# EAGLE board IR (EAGLE 9.4.2)
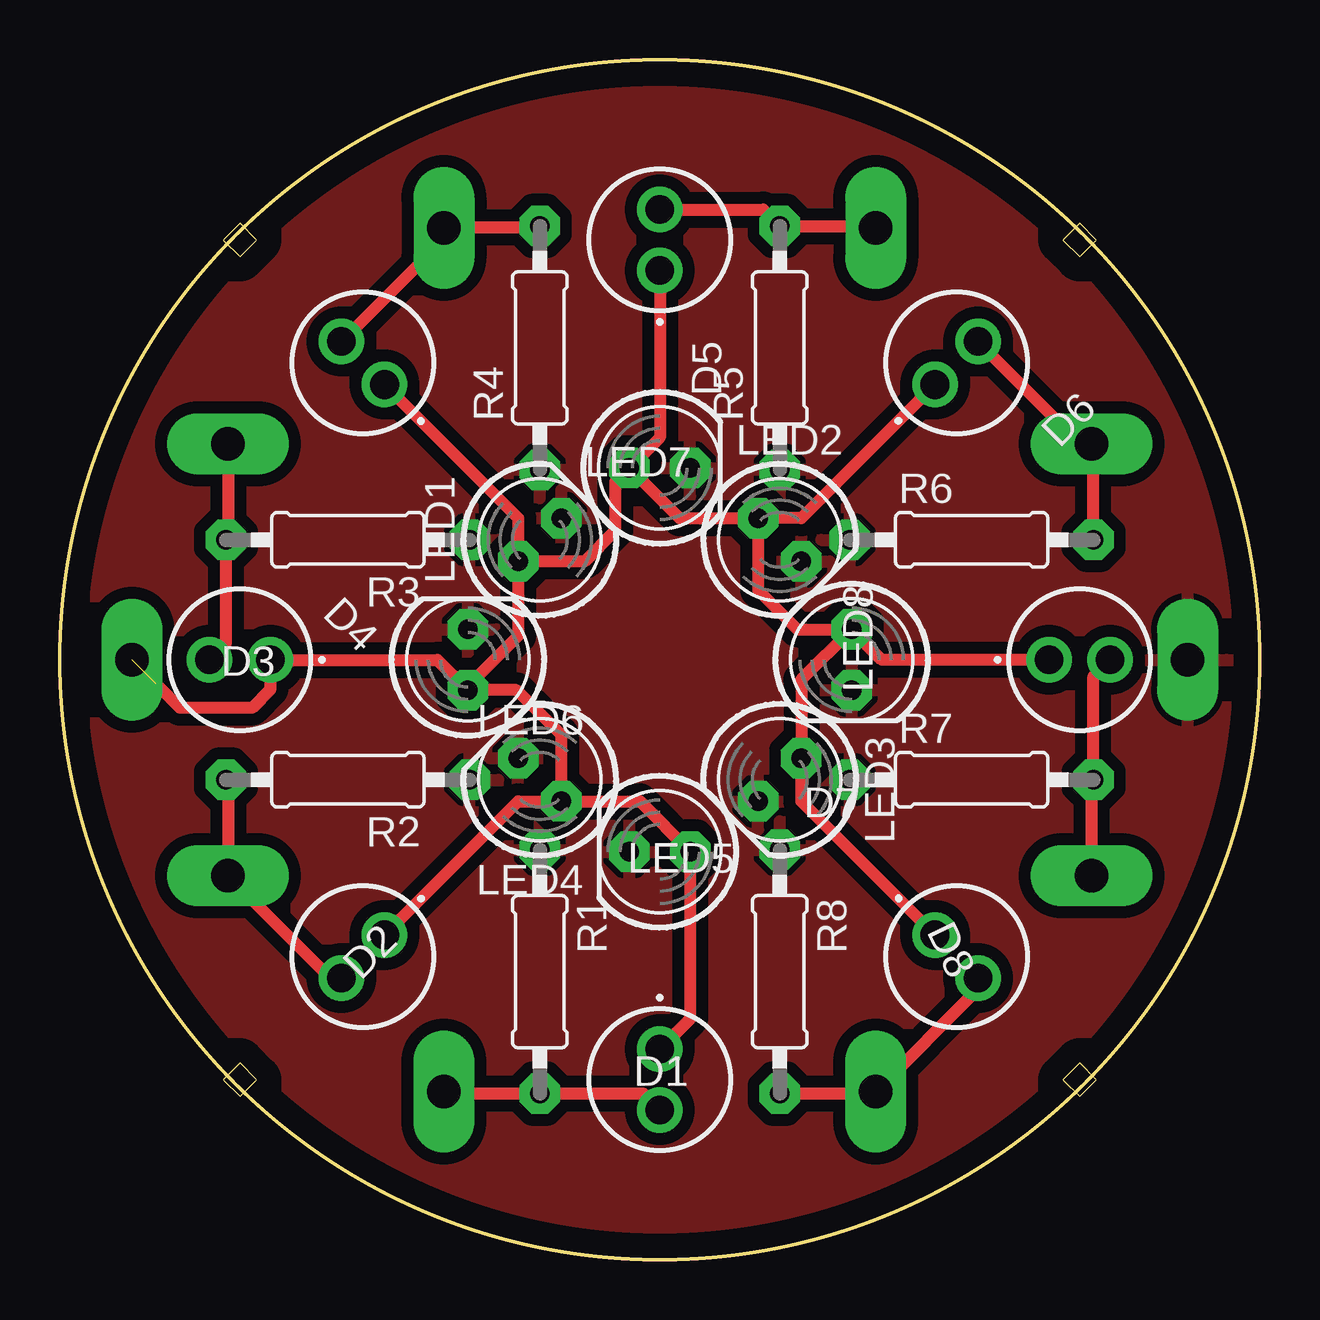
[diagram p0: board, top side]

Size 50 x 50 mm. Coordinates in mm from the lower left corner, seen from the top.
Outline: circle at 25,25 radius 25
Copper layers (1*16): Top 0.035mm / dielectric 1.5mm / Bottom 0.035mm
Design rules "default *": minimum track width 0.5mm, minimum drill 0.35mm, track to track 6mil, track to pad 6mil, pad to pad 6mil, via to via 6mil, smd to smd 6mil, copper to edge 40mil, drill to drill 6mil, minimum pad ring 10mil, minimum via ring 8mil, stop-mask expansion 4mil, vias tented up to drill 0mil, thermal gap 10mil

## Footprints (pad centres in the part's own frame; a part is rotated, then mirrored left to right if it is on the bottom)
SFH213_1 = drill 1.2 pad 1.9: 1 -1.27,0; 2 1.27,0
1X1-BIGPOGO = drill 1.4 pad 2.54 long: P$1 0,0
LED5MM = drill 0.813 pad 1.676 octagon: A -1.27,0; K 1.27,0
0207/10 = drill 0.813 pad 1.676 octagon: 1 -5.08,0; 2 5.08,0

## Placement (x,y rotation side)
D1  SFH_203_PFA  [SFH213_1]  25,7.5 270 top
D2  SFH_203_PFA  [SFH213_1]  12.63,12.63 225 top
D3  SFH_203_PFA  [SFH213_1]  7.5,25 180 top
D4  SFH_203_PFA  [SFH213_1]  12.63,37.37 135 top
D5  SFH_203_PFA  [SFH213_1]  25,42.5 90 top
D6  SFH_203_PFA  [SFH213_1]  37.37,37.37 45 top
D7  SFH_203_PFA  [SFH213_1]  42.5,25 0 top
D8  SFH_203_PFA  [SFH213_1]  37.37,12.63 315 top
JP1  4  [1X1-BIGPOGO]  16,43 270 top
JP2  5  [1X1-BIGPOGO]  34,43 270 top
JP3  3  [1X1-BIGPOGO]  7,34 180 top
JP4  6  [1X1-BIGPOGO]  43,34 180 top
JP5  8  [1X1-BIGPOGO]  34,7 90 top
JP6  2  [1X1-BIGPOGO]  7,16 180 top
JP7  7  [1X1-BIGPOGO]  43,16 180 top
JP8  1  [1X1-BIGPOGO]  16,7 90 top
JP9  GND  [1X1-BIGPOGO]  47,25 270 top
JP10  3.3  [1X1-BIGPOGO]  3,25 90 top
LED1  [LED5MM]  17,25 90 top
LED2  [LED5MM]  25,33 0 top
LED3  [LED5MM]  33,25 270 top
LED4  [LED5MM]  25,17 180 top
LED5  [LED5MM]  30,20 225 top
LED6  [LED5MM]  20,20 135 top
LED7  [LED5MM]  20,30 45 top
LED8  [LED5MM]  30,30 315 top
R1  [0207/10]  20,12 270 top
R2  [0207/10]  12,20 180 top
R3  [0207/10]  12,30 180 top
R4  [0207/10]  20,38 90 top
R5  [0207/10]  30,38 90 top
R6  [0207/10]  38,30 0 top
R7  [0207/10]  38,20 0 top
R8  [0207/10]  30,12 270 top

## Library data of the parts
D1-D8 = SFH_203_PFA; ALLIED_NUMBER: 70339002; ALLIED_PRICE-STOCK: https://www.alliedelec.com/osram-opto-semiconductors-sfh-203-pfa/70339002/; DESCRIPTION: IR T-1 PIN Photodiode 150,SFH203PFA Osram Opto SFH 203 PFA IR Si Photodiode, 75 , Through Hole 5mm package; HEIGHT: mm; MANUFACTURER_NAME: OSRAM Opto Semiconductors; MANUFACTURER_PART_NUMBER: SFH 203 PFA; MOUSER_PART_NUMBER: 720-SFH203PFA; MOUSER_PRICE-STOCK: https://www.mouser.com/Search/Refine.aspx?Keyword=720-SFH203PFA; RS_PART_NUMBER: 6548665; RS_PRICE-STOCK: https://uk.rs-online.com/web/p/products/6548665
JP1-JP10 LED1-LED8 R1-R8 = adafruit

## Nets
N$1: D1.2 JP8.P$1 R1.2
N$2: D2.2 JP6.P$1 R2.2
N$3: D3.2 JP3.P$1 R3.2
N$4: D4.2 JP1.P$1 R4.2
N$5: D5.2 JP2.P$1 R5.2
N$6: D6.2 JP4.P$1 R6.2
N$7: D7.2 JP7.P$1 R7.2
N$8: D8.2 JP5.P$1 R8.2
N$9: D1.1 D2.1 D3.1 D4.1 D5.1 D6.1 D7.1 D8.1 JP10.P$1 LED1.A LED2.A LED3.A LED4.A LED5.A LED6.A LED7.A LED8.A
N$10: JP9.P$1 LED1.K LED2.K LED3.K LED4.K LED5.K LED6.K LED7.K LED8.K R1.1 R2.1 R3.1 R4.1 R5.1 R6.1 R7.1 R8.1

## Tracks (layer width: path | path; a pad name or v marks a point on that pad's centre or on a via)
N$1
  Top 0.5: D1.2 24.31,6.92 R1.2 17,6.92 JP8.P$1
N$2
  Top 0.5: 6.92,17.08 7,17 | 7,17 JP6.P$1 11.27,11.73 D2.2 | R2.2 7,19.92 7,17
N$3
  Top 0.5: JP3.P$1 7,30.08 R3.2 6.92,25.69 D3.2
N$4
  Top 0.5: R4.2 19.96,43.04 | 19.96,43.04 19.92,43 | D4.2 16,42.54 JP1.P$1 16.04,43.04 19.96,43.04
N$5
  Top 0.5: 30.08,43 R5.2 | R5.2 33.92,43.08 JP2.P$1 | D5.2 29.31,43.77 R5.2
N$6
  Top 0.5: R6.2 43.08,33.92 JP4.P$1 42.54,34 D6.2
N$7
  Top 0.5: 43.08,16.08 JP7.P$1 43,19.92 R7.2 43.08,24.31 D7.2
N$8
  Top 0.5: R8.2 33.92,6.92 JP5.P$1 38.27,11.27 D8.2
N$9  (1 unrouted)
  Top 0.5: 4,24 5,23 8,23 8.77,23.77 D3.1 15.73,25 LED1.A | D5.1 25,34.27 LED2.A | LED2.A 25.83,30.9 LED8.A | LED8.A 29.1,27.9 30.73,26.27 LED3.A | LED3.A 30.9,24.17 LED5.A 30.9,19.1 D8.1 | LED2.A 23.14,32.41 23.14,30.38 21.86,29.1 LED7.A | LED7.A 19.1,26 17,23.9 LED1.A | LED6.A 20.9,21.86 19.02,23.73 LED1.A | LED6.A 24.17,19.1 LED4.A 26.27,10.04 D1.1 | D4.1 19.1,30.9 LED7.A | D6.1 30.9,30.9 LED8.A | LED3.A 34.27,25 D7.1 | D2.1 19.1,19.1 LED6.A
N$10
  pour Top (isolate 0.5): 0,50 -5,45 -5,1 4,-8 51,-8 58,-1 58,25 58,47 51,54 4,54